# Altium PCB LPS.PcbDoc
Units mm, origin at the board's own origin, x right, y up, seen from the top; angles counter-clockwise.
Board outline 50 x 100 mm, 2 copper layers (Top Layer, Bottom Layer); 34 components, 18 nets, 81 pads, 2 vias.
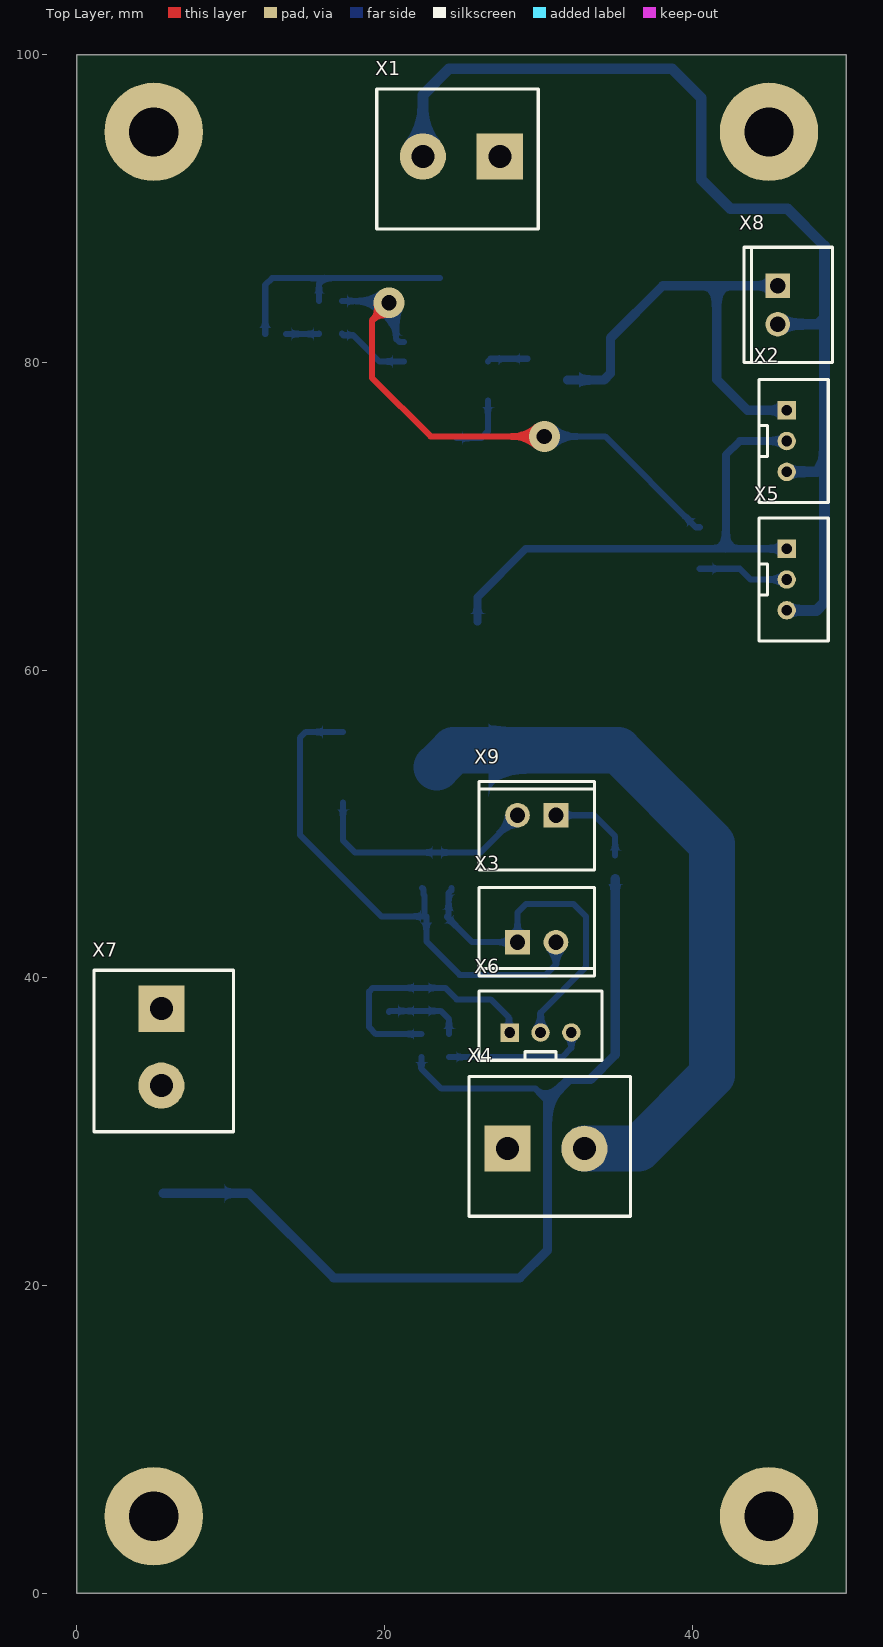
[diagram p0: Top Layer view]
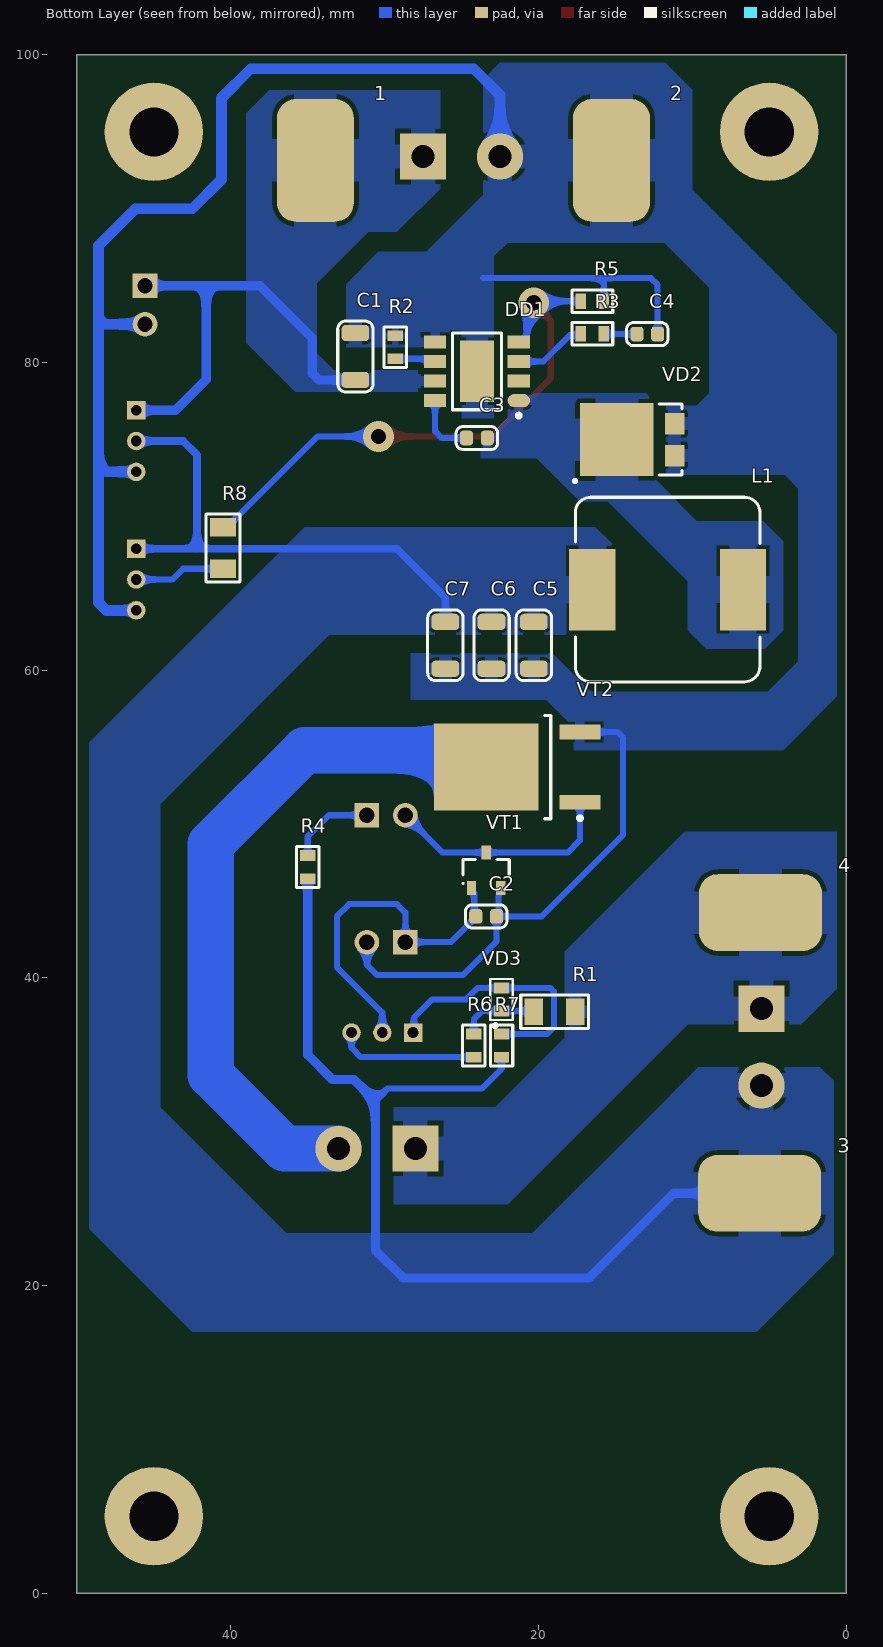
[diagram p1: Bottom Layer view, seen from below]
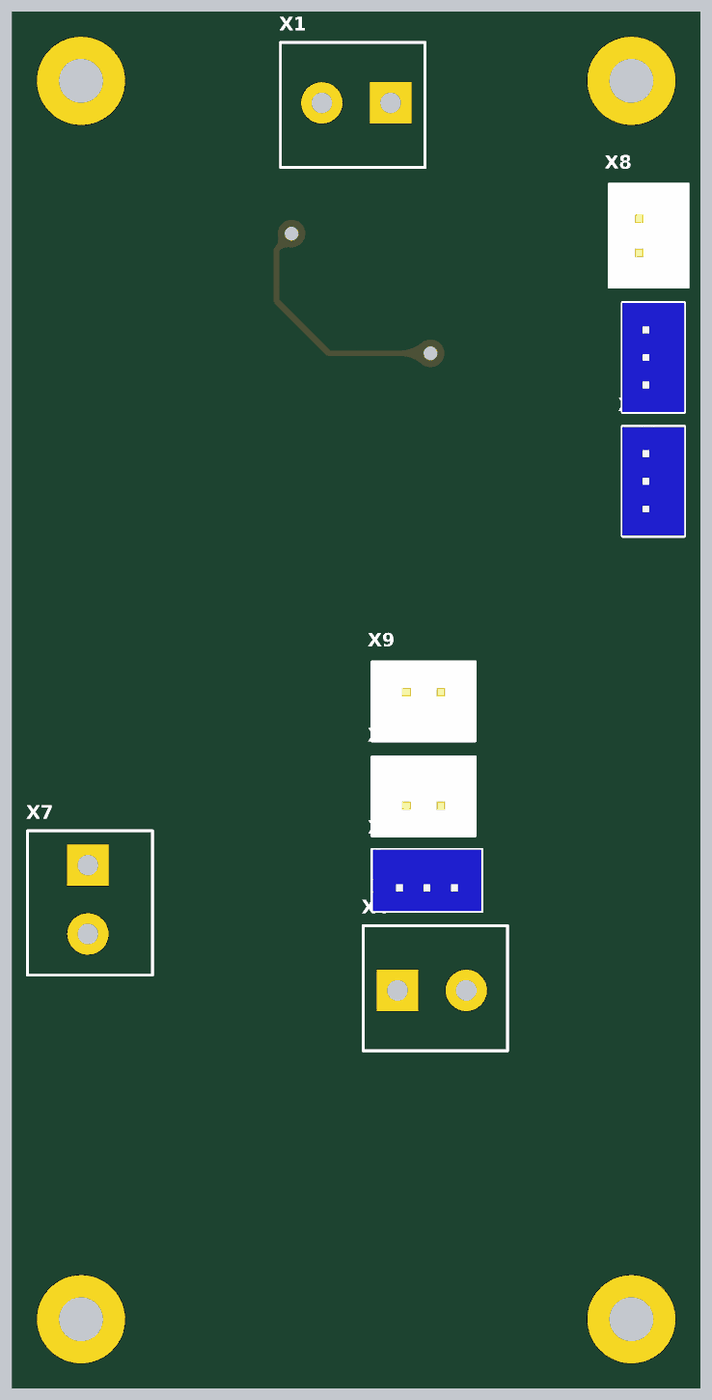
[diagram p2: 3D render of the assembled board from above, using the file's embedded part models]
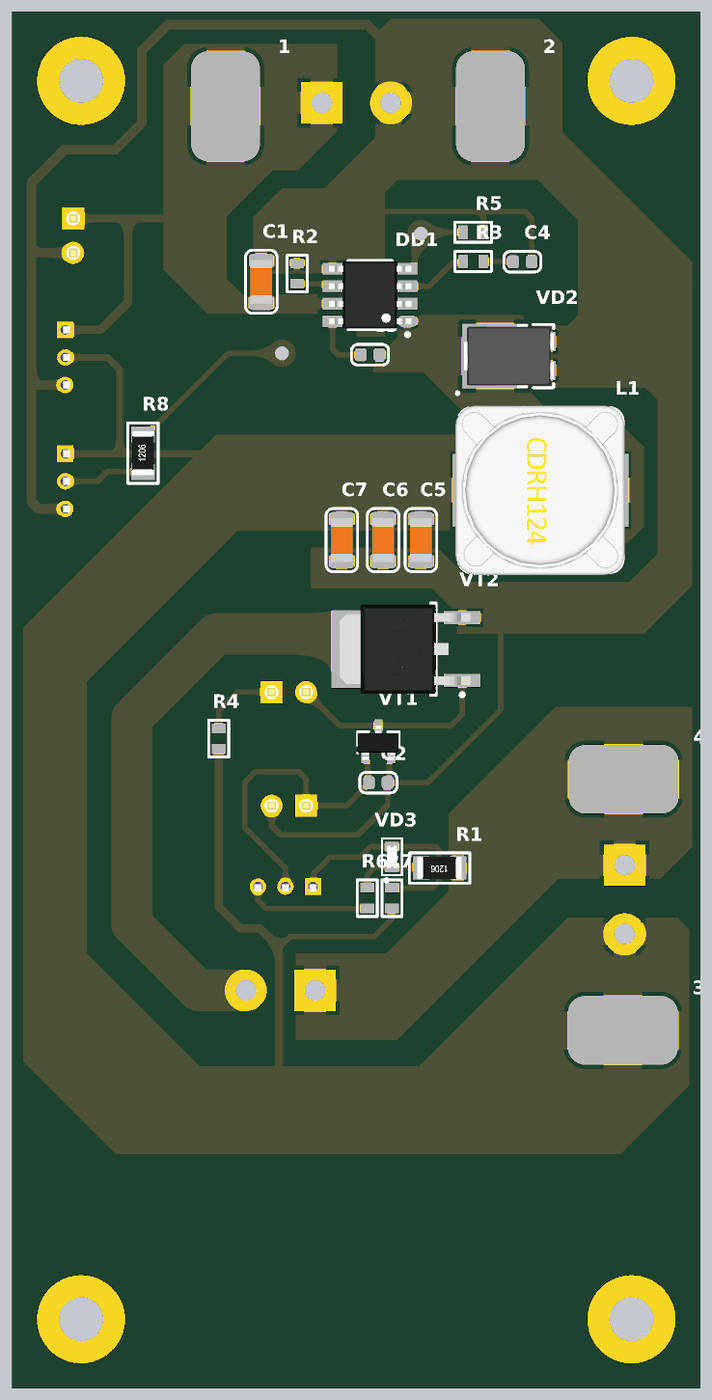
[diagram p3: 3D render of the assembled board from below, using the file's embedded part models]

## Layer stack, top to bottom
Top Solder: solder mask 0.0102, Solder Resist, Dk 3.5
Top Layer: signal copper 0.0356
Dielectric 1: dielectric 0.32, FR-4, Dk 4.8
Bottom Layer: signal copper 0.0356
Bottom Solder: solder mask 0.0102, Solder Resist, Dk 3.5

## Board outline
0.006,0.006 50.006,0.006 50.006,100.006 0.006,100.006

## Design rules (kind name [scope] priority, off if disabled: settings)
AcuteAngle min_acute_angle [OnCopper] p1: minimum=3.50000000000000E+0001 checktracksonly=FALSE // Минимальный угол между примитивами топологии
BoardOutlineClearance board_outline_clearance_std [NOT (OnLayer('Bottom Overlay') OR OnLayer('Top Overlay'))] p1: gap=0.25 ignorepadtopadclearanceinfootprint=FALSE except(0: Arc-SplitContinuation Track-SplitContinuation SMDPad-SplitContinuation THPad-SplitContinuation Via-SplitContinuation Fill-SplitContinuation Poly-SplitContinuation Region-SplitContinuation Text-SplitContinuation) // Отступ элементов топологии от края фрезеруемой печатной платы
Clearance clearance_poly_to_diff [InPolygonClass('FILL') vs InAnyDifferentialPair] p1: gap=0.2 ignorepadtopadclearanceinfootprint=FALSE except(0.25: Arc-Hole Track-Hole SMDPad-Hole THPad-Hole Via-Hole Fill-Hole Poly-Hole Region-Hole Text-Hole; 0.5: Arc-Poly Track-Poly SMDPad-Poly THPad-Poly Via-Poly) // Зазор между полигоном и дифференциальной парой
Clearance clearance_outer_35um_std [OnTopLayer OR OnBottomLayer] p2: gap=0.4 ignorepadtopadclearanceinfootprint=FALSE // Зазоры на внешних слоях
Clearance clearance_inner_35um_std [NOT (OnTopLayer Or OnBottomLayer)] p3: gap=0.2 ignorepadtopadclearanceinfootprint=FALSE except(0.25: Arc-Hole Track-Hole SMDPad-Hole THPad-Hole Via-Hole Fill-Hole Poly-Hole Region-Hole Text-Hole) // Зазоры на внутренних слоях
ComponentClearance [All] p1: gap=0 collisioncheckmode=3 verticalgap=0 showdistances=FALSE
DiffPairsRouting diff_pairs_routing [All] p1: maxlimit=0.127 minlimit=0.127 mostfreqgap=0.127 toplayer_minwidth=0.143 toplayer_maxwidth=0.143 toplayer_prefwidth=0.143 bottomlayer_minwidth=0.143 bottomlayer_maxwidth=0.143 bottomlayer_prefwidth=0.143 impedanceprofiledriven=TRUE impedanceprofileid={FD46899E-B5A2-4EF5-A302-5D2DB6A51F35} maxuncoupledlength=12.7 // Правила трассировки дифференциальных пар
HoleSize min_hole_size_std [IsPad] p1: absolutevalues=TRUE maxlimit=5.9 minlimit=0.6 maxpercent=80.000 minpercent=20.000 // Диаметр межслойного переходного отверстия
HoleSize min_hole_size_via_std [IsVia] p2: absolutevalues=TRUE maxlimit=5.9 minlimit=0.3 maxpercent=80.000 minpercent=20.000 // Минимальный диаметр монтажного отверстия
HoleToHoleClearance hole_to_hole_clearance_std [All] p1: gap=0.2 allowstackedmicrovias=FALSE // Минимальное расстояние между краями двух отверстий
MinimumAnnularRing min_via_ar_std [All] p1: minimumring=0.15 // Поясок площадки переходного отверстия (Annular ring VIA)
MinimumAnnularRing min_pad_ar_std [All] p2: minimumring=0.2 // Поясок монтажной контактной площадки (Annular ring PAD)
MinimumSolderMaskSliver min_solder_mask_bridge_std [All] p1: minsoldermaskwidth=0.15 // Мнимальная ширина масочного мостика
PlaneClearance plane_clearance_antipads [InAnyDifferentialPair] p1: clearance=0.5 // Отступ полигона от дифференциальных пар
PlaneClearance plane_clearance_35um_std [All] p2: clearance=0.2 // Отступ полигона (для слоя plane) от элементов топологии
PlaneConnect "plane_connect_to pad<=0.3" [(AsMM(PadXSize_AllLayers)<=0.301) or (AsMM(PadYSize_AllLayers)<=0.301)] p1 off: pad.planeconnectstyle=Relief pad.reliefexpansion=0.2 pad.reliefentries=4 pad.reliefconductorwidth=0.2 pad.reliefairgap=0.2 via.planeconnectstyle=Direct via.reliefexpansion=0.5 via.reliefentries=4 via.reliefconductorwidth=0.2 via.reliefairgap=0.2 // Правила подключения полигонов для падов от 0,3мм и меньше
PlaneConnect "plane_connect_to pad<=0.4" [(AsMM(PadXSize_AllLayers)<=0.401) or (AsMM(PadYSize_AllLayers)<=0.401)] p2 off: pad.planeconnectstyle=Relief pad.reliefexpansion=0.2 pad.reliefentries=4 pad.reliefconductorwidth=0.2 pad.reliefairgap=0.3 via.planeconnectstyle=Direct via.reliefexpansion=0.5 via.reliefentries=4 via.reliefconductorwidth=0.2 via.reliefairgap=0.2 // Правила подключения полигонов для падов от 0,4мм и меньше
PlaneConnect "plane_connect_to pad<=0.6" [(AsMM(PadXSize_AllLayers)<=0.601) or (AsMM(PadYSize_AllLayers)<=0.601)] p3 off: pad.planeconnectstyle=Relief pad.reliefexpansion=0.2 pad.reliefentries=4 pad.reliefconductorwidth=0.3 pad.reliefairgap=0.3 via.planeconnectstyle=Direct via.reliefexpansion=0.5 via.reliefentries=4 via.reliefconductorwidth=0.2 via.reliefairgap=0.2 // Правила подключения полигонов для падов от 0,6мм и меньше
PlaneConnect "plane_connect_to pad<=0.7" [(AsMM(PadXSize_AllLayers)<=0.701) or (AsMM(PadYSize_AllLayers)<=0.701)] p4 off: pad.planeconnectstyle=Relief pad.reliefexpansion=0.6 pad.reliefentries=4 pad.reliefconductorwidth=0.35 pad.reliefairgap=0.3 via.planeconnectstyle=Direct via.reliefexpansion=0.5 via.reliefentries=4 via.reliefconductorwidth=0.2 via.reliefairgap=0.2 // Правила подключения полигонов для падов от 0,7мм и меньше
PlaneConnect "plane_connect_to pad<=0.8" [(AsMM(PadXSize_AllLayers)<=0.801) or (AsMM(PadYSize_AllLayers)<=0.801)] p5 off: pad.planeconnectstyle=Relief pad.reliefexpansion=0.7 pad.reliefentries=4 pad.reliefconductorwidth=0.4 pad.reliefairgap=0.3 via.planeconnectstyle=Direct via.reliefexpansion=0.5 via.reliefentries=4 via.reliefconductorwidth=0.2 via.reliefairgap=0.2 // Правила подключения полигонов для падов от 0,8мм и меньше
PlaneConnect "plane_connect_to pad<=1" [(AsMM(PadXSize_AllLayers)<=1.01) or (AsMM(PadYSize_AllLayers)<=1.01)] p6 off: pad.planeconnectstyle=Relief pad.reliefexpansion=0.8 pad.reliefentries=4 pad.reliefconductorwidth=0.5 pad.reliefairgap=0.3 via.planeconnectstyle=Direct via.reliefexpansion=0.5 via.reliefentries=4 via.reliefconductorwidth=0.2 via.reliefairgap=0.2 // Правила подключения полигонов для падов от 1мм и меньше
PlaneConnect "plane_connect_to pad<=1.3" [(AsMM(PadXSize_AllLayers)<=1.31) or (AsMM(PadYSize_AllLayers)<=1.31)] p7 off: pad.planeconnectstyle=Relief pad.reliefexpansion=1.1 pad.reliefentries=4 pad.reliefconductorwidth=0.65 pad.reliefairgap=0.3 via.planeconnectstyle=Direct via.reliefexpansion=0.5 via.reliefentries=4 via.reliefconductorwidth=0.2 via.reliefairgap=0.2 // Правила подключения полигонов для падов от 1,3мм и меньше
PlaneConnect "plane_connect_to pad<=1.6" [(AsMM(PadXSize_AllLayers)<=1.61) or (AsMM(PadYSize_AllLayers)<=1.61)] p8 off: pad.planeconnectstyle=Relief pad.reliefexpansion=1.4 pad.reliefentries=4 pad.reliefconductorwidth=0.8 pad.reliefairgap=0.3 via.planeconnectstyle=Direct via.reliefexpansion=0.5 via.reliefentries=4 via.reliefconductorwidth=0.2 via.reliefairgap=0.2 // Правила подключения полигонов для падов от 1,6мм и меньше
PlaneConnect "plane_connect_to pad<=1.8" [(AsMM(PadXSize_AllLayers)<=1.81) or (AsMM(PadYSize_AllLayers)<=1.81)] p9 off: pad.planeconnectstyle=Relief pad.reliefexpansion=1.6 pad.reliefentries=4 pad.reliefconductorwidth=0.9 pad.reliefairgap=0.3 via.planeconnectstyle=Direct via.reliefexpansion=0.5 via.reliefentries=4 via.reliefconductorwidth=0.2 via.reliefairgap=0.2 // Правила подключения полигонов для падов от 1,8мм и меньше
PlaneConnect "plane_connect_to pad<=2" [(AsMM(PadXSize_AllLayers)<=2.01) or (AsMM(PadYSize_AllLayers)<=2.01)] p10 off: pad.planeconnectstyle=Relief pad.reliefexpansion=1.8 pad.reliefentries=4 pad.reliefconductorwidth=1 pad.reliefairgap=0.3 via.planeconnectstyle=Direct via.reliefexpansion=0.5 via.reliefentries=4 via.reliefconductorwidth=0.2 via.reliefairgap=0.2 // Правила подключения полигонов для падов от 2мм и меньше
PlaneConnect "plane_connect_to pad<=2.3" [(AsMM(PadXSize_AllLayers)<=2.31) or (AsMM(PadYSize_AllLayers)<=2.31)] p11 off: pad.planeconnectstyle=Relief pad.reliefexpansion=2.1 pad.reliefentries=4 pad.reliefconductorwidth=1.15 pad.reliefairgap=0.3 via.planeconnectstyle=Direct via.reliefexpansion=0.5 via.reliefentries=4 via.reliefconductorwidth=0.2 via.reliefairgap=0.2 // Правила подключения полигонов для падов от 2,3мм и меньше
PlaneConnect "plane_connect_to pad<=2.5" [(AsMM(PadXSize_AllLayers)<=2.51) or (AsMM(PadYSize_AllLayers)<=2.51)] p12 off: pad.planeconnectstyle=Relief pad.reliefexpansion=2.3 pad.reliefentries=4 pad.reliefconductorwidth=1.25 pad.reliefairgap=0.3 via.planeconnectstyle=Direct via.reliefexpansion=0.5 via.reliefentries=4 via.reliefconductorwidth=0.2 via.reliefairgap=0.2 // Правила подключения полигонов для падов от 2,5мм и меньше
PlaneConnect "plane_connect_to pad<=2.7" [(AsMM(PadXSize_AllLayers)<=2.71) or (AsMM(PadYSize_AllLayers)<=2.71)] p13 off: pad.planeconnectstyle=Relief pad.reliefexpansion=2.5 pad.reliefentries=4 pad.reliefconductorwidth=1.35 pad.reliefairgap=0.3 via.planeconnectstyle=Direct via.reliefexpansion=0.5 via.reliefentries=4 via.reliefconductorwidth=0.2 via.reliefairgap=0.2 // Правила подключения полигонов для падов от 2,7мм и меньше
PlaneConnect "plane_connect_to pad<=3" [(AsMM(PadXSize_AllLayers)<=3.01) or (AsMM(PadYSize_AllLayers)<=3.01)] p14 off: pad.planeconnectstyle=Relief pad.reliefexpansion=2.8 pad.reliefentries=4 pad.reliefconductorwidth=1.5 pad.reliefairgap=0.3 via.planeconnectstyle=Direct via.reliefexpansion=0.5 via.reliefentries=4 via.reliefconductorwidth=0.2 via.reliefairgap=0.2 // Правила подключения полигонов для падов от 3мм и меньше
PlaneConnect "plane_connect_to pad<=3.5" [(AsMM(PadXSize_AllLayers)<=3.51) or (AsMM(PadYSize_AllLayers)<=3.51)] p15 off: pad.planeconnectstyle=Relief pad.reliefexpansion=3.3 pad.reliefentries=4 pad.reliefconductorwidth=1.75 pad.reliefairgap=0.4 via.planeconnectstyle=Direct via.reliefexpansion=0.5 via.reliefentries=4 via.reliefconductorwidth=0.2 via.reliefairgap=0.2 // Правила подключения полигонов для падов от 3.5мм и меньше
PlaneConnect "plane_connect_to pad<=4" [(AsMM(PadXSize_AllLayers)<=4.01) or (AsMM(PadYSize_AllLayers)<=4.01)] p16 off: pad.planeconnectstyle=Relief pad.reliefexpansion=3.8 pad.reliefentries=4 pad.reliefconductorwidth=2 pad.reliefairgap=0.4 via.planeconnectstyle=Direct via.reliefexpansion=0.5 via.reliefentries=4 via.reliefconductorwidth=0.2 via.reliefairgap=0.2 // Правила подключения полигонов для падов от 4мм и меньше
PlaneConnect "plane_connect_to pad<=4.5" [(AsMM(PadXSize_AllLayers)<=4.51) or (AsMM(PadYSize_AllLayers)<=4.51)] p17 off: pad.planeconnectstyle=Relief pad.reliefexpansion=4.3 pad.reliefentries=4 pad.reliefconductorwidth=2.25 pad.reliefairgap=0.4 via.planeconnectstyle=Direct via.reliefexpansion=0.5 via.reliefentries=4 via.reliefconductorwidth=0.2 via.reliefairgap=0.2 // Правила подключения полигонов для падов от 4.5мм и меньше
PlaneConnect "plane_connect_to pad<=5" [(AsMM(PadXSize_AllLayers)<=5.01) or (AsMM(PadYSize_AllLayers)<=5.01)] p18 off: pad.planeconnectstyle=Relief pad.reliefexpansion=4.8 pad.reliefentries=4 pad.reliefconductorwidth=2.5 pad.reliefairgap=0.4 via.planeconnectstyle=Direct via.reliefexpansion=0.5 via.reliefentries=4 via.reliefconductorwidth=0.2 via.reliefairgap=0.2 // Правила подключения полигонов для падов от 5мм и меньше
PlaneConnect "plane_connect_to pad<=5.5" [(AsMM(PadXSize_AllLayers)<=5.51) or (AsMM(PadYSize_AllLayers)<=5.51)] p19 off: pad.planeconnectstyle=Relief pad.reliefexpansion=5.3 pad.reliefentries=4 pad.reliefconductorwidth=2.75 pad.reliefairgap=0.4 via.planeconnectstyle=Direct via.reliefexpansion=0.5 via.reliefentries=4 via.reliefconductorwidth=0.2 via.reliefairgap=0.2 // Правила подключения полигонов для падов от 5,5мм и меньше
PlaneConnect "plane_connect_to pad<=6" [(AsMM(PadXSize_AllLayers)<=6.01) or (AsMM(PadYSize_AllLayers)<=6.01)] p20 off: pad.planeconnectstyle=Relief pad.reliefexpansion=5.8 pad.reliefentries=4 pad.reliefconductorwidth=3 pad.reliefairgap=0.5 via.planeconnectstyle=Direct via.reliefexpansion=0.5 via.reliefentries=4 via.reliefconductorwidth=0.2 via.reliefairgap=0.2 // Правила подключения полигонов для падов от 6мм и меньше
PlaneConnect "plane_connect_to pad<=6.5" [(AsMM(PadXSize_AllLayers)<=6.51) or (AsMM(PadYSize_AllLayers)<=6.51)] p21 off: pad.planeconnectstyle=Relief pad.reliefexpansion=6.3 pad.reliefentries=4 pad.reliefconductorwidth=3.25 pad.reliefairgap=0.5 via.planeconnectstyle=Direct via.reliefexpansion=0.5 via.reliefentries=4 via.reliefconductorwidth=0.2 via.reliefairgap=0.2 // Правила подключения полигонов для падов от 6,5мм и меньше
PlaneConnect "plane_connect_to pad<=7" [(AsMM(PadXSize_AllLayers)<=7.01) or (AsMM(PadYSize_AllLayers)<=7.01)] p22 off: pad.planeconnectstyle=Relief pad.reliefexpansion=6.8 pad.reliefentries=4 pad.reliefconductorwidth=3.5 pad.reliefairgap=0.5 via.planeconnectstyle=Direct via.reliefexpansion=0.5 via.reliefentries=4 via.reliefconductorwidth=0.2 via.reliefairgap=0.2 // Правила подключения полигонов для падов от 7мм и меньше
PlaneConnect "plane_connect_to pad<=7.5" [(AsMM(PadXSize_AllLayers)<=7.51) or (AsMM(PadYSize_AllLayers)<=7.51)] p23 off: pad.planeconnectstyle=Relief pad.reliefexpansion=7.3 pad.reliefentries=4 pad.reliefconductorwidth=3.75 pad.reliefairgap=0.5 via.planeconnectstyle=Direct via.reliefexpansion=0.5 via.reliefentries=4 via.reliefconductorwidth=0.2 via.reliefairgap=0.2 // Правила подключения полигонов для падов от 7,5мм и меньше
PlaneConnect "plane_connect_to pad<=8" [(AsMM(PadXSize_AllLayers)<=8.01) or (AsMM(PadYSize_AllLayers)<=8.01)] p24 off: pad.planeconnectstyle=Relief pad.reliefexpansion=7.8 pad.reliefentries=4 pad.reliefconductorwidth=4 pad.reliefairgap=0.5 via.planeconnectstyle=Direct via.reliefexpansion=0.5 via.reliefentries=4 via.reliefconductorwidth=0.2 via.reliefairgap=0.2 // Правила подключения полигонов для падов от 8мм и меньше
PlaneConnect "plane_connect_to pad<=8.5" [(AsMM(PadXSize_AllLayers)<=8.51) or (AsMM(PadYSize_AllLayers)<=8.51)] p25 off: pad.planeconnectstyle=Relief pad.reliefexpansion=8.3 pad.reliefentries=4 pad.reliefconductorwidth=4.25 pad.reliefairgap=0.5 via.planeconnectstyle=Direct via.reliefexpansion=0.5 via.reliefentries=4 via.reliefconductorwidth=0.2 via.reliefairgap=0.2 // Правила подключения полигонов для падов от 8,5мм и меньше
PlaneConnect "plane_connect_to pad<=9" [(AsMM(PadXSize_AllLayers)<=9.01) or (AsMM(PadYSize_AllLayers)<=9.01)] p26 off: pad.planeconnectstyle=Relief pad.reliefexpansion=8.8 pad.reliefentries=4 pad.reliefconductorwidth=4.5 pad.reliefairgap=0.5 via.planeconnectstyle=Direct via.reliefexpansion=0.5 via.reliefentries=4 via.reliefconductorwidth=0.2 via.reliefairgap=0.2 // Правила подключения полигонов для падов от 9мм и меньше
PlaneConnect "plane_connect_to pad<=9.5" [(AsMM(PadXSize_AllLayers)<=9.51) or (AsMM(PadYSize_AllLayers)<=9.51)] p27 off: pad.planeconnectstyle=Relief pad.reliefexpansion=9.3 pad.reliefentries=4 pad.reliefconductorwidth=4.75 pad.reliefairgap=0.5 via.planeconnectstyle=Direct via.reliefexpansion=0.5 via.reliefentries=4 via.reliefconductorwidth=0.2 via.reliefairgap=0.2 // Правила подключения полигонов для падов от 9,5мм и меньше
PlaneConnect "plane_connect_to pad<=10" [(AsMM(PadXSize_AllLayers)<=10.01) or (AsMM(PadYSize_AllLayers)<=10.01)] p28 off: pad.planeconnectstyle=Relief pad.reliefexpansion=9.8 pad.reliefentries=4 pad.reliefconductorwidth=5 pad.reliefairgap=0.5 via.planeconnectstyle=Direct via.reliefexpansion=0.5 via.reliefentries=4 via.reliefconductorwidth=0.2 via.reliefairgap=0.2 // Правила подключения полигонов для падов от 10мм и меньше
PlaneConnect plane_connect_to_pad [All] p29 off: pad.planeconnectstyle=Relief pad.reliefexpansion=0.5 pad.reliefentries=4 pad.reliefconductorwidth=0.2 pad.reliefairgap=0.2 via.planeconnectstyle=Direct via.reliefexpansion=0.5 via.reliefentries=4 via.reliefconductorwidth=0.2 via.reliefairgap=0.2 // Правила подключения полигонов общие
PlaneConnect [All] p30 off: planeconnectstyle=Relief reliefexpansion=0.5 reliefentries=4 reliefconductorwidth=0.2 reliefairgap=0.2
PolygonConnect poly_connect_direct [InPolygonClass('DIRECT')] p1: connectstyle=Direct reliefconductorwidth=0.254 reliefentries=4 polygonreliefangle="90 Angle" airgapwidth=0.254 // Подключение без термобарьеров к полигонам, относящимся к классу DIRECT
PolygonConnect poly_connect_to_pad<=0.3 [(AsMM(PadXSize_AllLayers)<=0.301) or (AsMM(PadYSize_AllLayers)<=0.301)] p2: thpad.connectstyle=Relief thpad.reliefconductorwidth=0.2 thpad.reliefentries=4 thpad.polygonreliefangle="90 Angle" thpad.airgapwidth=0.2 smdpad.connectstyle=Relief smdpad.reliefconductorwidth=0.2 smdpad.reliefentries=4 smdpad.polygonreliefangle="90 Angle" smdpad.airgapwidth=0.2 via.connectstyle=Direct via.reliefconductorwidth=0.254 via.reliefentries=4 via.polygonreliefangle="90 Angle" via.airgapwidth=0.254 // Правила подключения полигонов для падов от 0,3мм и меньше
PolygonConnect poly_connect_to_pad<=0.4 [(AsMM(PadXSize_AllLayers)<=0.401) or (AsMM(PadYSize_AllLayers)<=0.401)] p3: thpad.connectstyle=Relief thpad.reliefconductorwidth=0.26 thpad.reliefentries=4 thpad.polygonreliefangle="90 Angle" thpad.airgapwidth=0.2 smdpad.connectstyle=Relief smdpad.reliefconductorwidth=0.26 smdpad.reliefentries=4 smdpad.polygonreliefangle="90 Angle" smdpad.airgapwidth=0.2 via.connectstyle=Direct via.reliefconductorwidth=0.254 via.reliefentries=4 via.polygonreliefangle="90 Angle" via.airgapwidth=0.254 // Правила подключения полигонов для падов от 0,4 и меньше
PolygonConnect poly_connect_to_pad<=0.6 [(AsMM(PadXSize_AllLayers)<=0.601) or (AsMM(PadYSize_AllLayers)<=0.601)] p4: thpad.connectstyle=Relief thpad.reliefconductorwidth=0.33 thpad.reliefentries=4 thpad.polygonreliefangle="90 Angle" thpad.airgapwidth=0.2 smdpad.connectstyle=Relief smdpad.reliefconductorwidth=0.33 smdpad.reliefentries=4 smdpad.polygonreliefangle="90 Angle" smdpad.airgapwidth=0.2 via.connectstyle=Direct via.reliefconductorwidth=0.254 via.reliefentries=4 via.polygonreliefangle="90 Angle" via.airgapwidth=0.254 // Правила подключения полигонов для падов от 0,6мм и меньше
PolygonConnect poly_connect_to_pad<=0.7 [(AsMM(PadXSize_AllLayers)<=0.701) or (AsMM(PadYSize_AllLayers)<=0.701)] p5: thpad.connectstyle=Relief thpad.reliefconductorwidth=0.46 thpad.reliefentries=4 thpad.polygonreliefangle="90 Angle" thpad.airgapwidth=0.2 smdpad.connectstyle=Relief smdpad.reliefconductorwidth=0.46 smdpad.reliefentries=4 smdpad.polygonreliefangle="90 Angle" smdpad.airgapwidth=0.2 via.connectstyle=Direct via.reliefconductorwidth=0.254 via.reliefentries=4 via.polygonreliefangle="90 Angle" via.airgapwidth=0.254 // Правила подключения полигонов для падов от 0,7мм и меньше
PolygonConnect poly_connect_to_pad<=0.8 [(AsMM(PadXSize_AllLayers)<=0.8)or(AsMM(PadYSize_AllLayers)<=0.8)] p6: thpad.connectstyle=Relief thpad.reliefconductorwidth=0.53 thpad.reliefentries=4 thpad.polygonreliefangle="90 Angle" thpad.airgapwidth=0.3 smdpad.connectstyle=Relief smdpad.reliefconductorwidth=0.53 smdpad.reliefentries=4 smdpad.polygonreliefangle="90 Angle" smdpad.airgapwidth=0.2 via.connectstyle=Direct via.reliefconductorwidth=0.254 via.reliefentries=4 via.polygonreliefangle="90 Angle" via.airgapwidth=0.254 // Правила подключения полигонов для падов от 0,8мм и меньше
PolygonConnect poly_connect_to_pad<=1 [(AsMM(PadXSize_AllLayers)<=1.01)or(AsMM(PadYSize_AllLayers)<=1.01)] p7: thpad.connectstyle=Relief thpad.reliefconductorwidth=0.6 thpad.reliefentries=4 thpad.polygonreliefangle="90 Angle" thpad.airgapwidth=0.3 smdpad.connectstyle=Relief smdpad.reliefconductorwidth=0.6 smdpad.reliefentries=4 smdpad.polygonreliefangle="90 Angle" smdpad.airgapwidth=0.2 via.connectstyle=Direct via.reliefconductorwidth=0.254 via.reliefentries=4 via.polygonreliefangle="90 Angle" via.airgapwidth=0.254 // Правила подключения полигонов для падов от 1мм и меньше
PolygonConnect poly_connect_to_pad<=1.3 [(AsMM(PadXSize_AllLayers)<=1.31)or(AsMM(PadYSize_AllLayers)<=1.31)] p8: thpad.connectstyle=Relief thpad.reliefconductorwidth=0.66 thpad.reliefentries=4 thpad.polygonreliefangle="90 Angle" thpad.airgapwidth=0.3 smdpad.connectstyle=Relief smdpad.reliefconductorwidth=0.86 smdpad.reliefentries=4 smdpad.polygonreliefangle="90 Angle" smdpad.airgapwidth=0.2 via.connectstyle=Direct via.reliefconductorwidth=0.254 via.reliefentries=4 via.polygonreliefangle="90 Angle" via.airgapwidth=0.254 // Правила подключения полигонов для падов от 1,3мм и меньше
PolygonConnect poly_connect_to_pad<=1.6 [(AsMM(PadXSize_AllLayers)<=1.61)or(AsMM(PadYSize_AllLayers)<=1.61)] p9: thpad.connectstyle=Relief thpad.reliefconductorwidth=0.8 thpad.reliefentries=4 thpad.polygonreliefangle="90 Angle" thpad.airgapwidth=0.3 smdpad.connectstyle=Relief smdpad.reliefconductorwidth=1 smdpad.reliefentries=4 smdpad.polygonreliefangle="90 Angle" smdpad.airgapwidth=0.2 via.connectstyle=Direct via.reliefconductorwidth=0.254 via.reliefentries=4 via.polygonreliefangle="90 Angle" via.airgapwidth=0.254 // Правила подключения полигонов для падов от 1,6мм и меньше
PolygonConnect poly_connect_to_pad<=1.8 [(AsMM(PadXSize_AllLayers)<=1.8)or(AsMM(PadYSize_AllLayers)<=1.8)] p10: thpad.connectstyle=Relief thpad.reliefconductorwidth=1 thpad.reliefentries=4 thpad.polygonreliefangle="90 Angle" thpad.airgapwidth=0.3 smdpad.connectstyle=Relief smdpad.reliefconductorwidth=1.2 smdpad.reliefentries=4 smdpad.polygonreliefangle="90 Angle" smdpad.airgapwidth=0.2 via.connectstyle=Direct via.reliefconductorwidth=0.254 via.reliefentries=4 via.polygonreliefangle="90 Angle" via.airgapwidth=0.254 // Правила подключения полигонов для падов от 1,8мм и меньше
PolygonConnect poly_connect_to_pad<=2 [(AsMM(PadXSize_AllLayers)<=2.01)or(AsMM(PadYSize_AllLayers)<=2.01)] p11: thpad.connectstyle=Relief thpad.reliefconductorwidth=1.1 thpad.reliefentries=4 thpad.polygonreliefangle="90 Angle" thpad.airgapwidth=0.3 smdpad.connectstyle=Relief smdpad.reliefconductorwidth=1.4 smdpad.reliefentries=4 smdpad.polygonreliefangle="90 Angle" smdpad.airgapwidth=0.2 via.connectstyle=Direct via.reliefconductorwidth=0.254 via.reliefentries=4 via.polygonreliefangle="90 Angle" via.airgapwidth=0.254 // Правила подключения полигонов для падов от 2мм и меньше
PolygonConnect poly_connect_to_pad<=2.3 [(AsMM(PadXSize_AllLayers)<=2.31)or(AsMM(PadYSize_AllLayers)<=2.31)] p12: thpad.connectstyle=Relief thpad.reliefconductorwidth=1.2 thpad.reliefentries=4 thpad.polygonreliefangle="90 Angle" thpad.airgapwidth=0.3 smdpad.connectstyle=Relief smdpad.reliefconductorwidth=1.4 smdpad.reliefentries=4 smdpad.polygonreliefangle="90 Angle" smdpad.airgapwidth=0.2 via.connectstyle=Direct via.reliefconductorwidth=0.254 via.reliefentries=4 via.polygonreliefangle="90 Angle" via.airgapwidth=0.254 // Правила подключения полигонов для падов от 2,3мм и меньше
PolygonConnect poly_connect_to_pad<=2.5 [(AsMM(PadXSize_AllLayers)<=2.51)or(AsMM(PadYSize_AllLayers)<=2.51)] p13: thpad.connectstyle=Relief thpad.reliefconductorwidth=1.2 thpad.reliefentries=4 thpad.polygonreliefangle="90 Angle" thpad.airgapwidth=0.3 smdpad.connectstyle=Relief smdpad.reliefconductorwidth=1.4 smdpad.reliefentries=4 smdpad.polygonreliefangle="90 Angle" smdpad.airgapwidth=0.2 via.connectstyle=Direct via.reliefconductorwidth=0.254 via.reliefentries=4 via.polygonreliefangle="90 Angle" via.airgapwidth=0.254 // Правила подключения полигонов для падов от 2,5мм и меньше
PolygonConnect poly_connect_to_pad<=2.7 [(AsMM(PadXSize_AllLayers)<=2.71)or(AsMM(PadYSize_AllLayers)<=2.71)] p14: thpad.connectstyle=Relief thpad.reliefconductorwidth=1.4 thpad.reliefentries=4 thpad.polygonreliefangle="90 Angle" thpad.airgapwidth=0.3 smdpad.connectstyle=Relief smdpad.reliefconductorwidth=1.6 smdpad.reliefentries=4 smdpad.polygonreliefangle="90 Angle" smdpad.airgapwidth=0.2 via.connectstyle=Direct via.reliefconductorwidth=0.254 via.reliefentries=4 via.polygonreliefangle="90 Angle" via.airgapwidth=0.254 // Правила подключения полигонов для падов от 2,7мм и меньше
PolygonConnect poly_connect_to_pad<=3 [(AsMM(PadXSize_AllLayers)<=3.01)or(AsMM(PadYSize_AllLayers)<=3.01)] p15: thpad.connectstyle=Relief thpad.reliefconductorwidth=1.6 thpad.reliefentries=4 thpad.polygonreliefangle="90 Angle" thpad.airgapwidth=0.3 smdpad.connectstyle=Relief smdpad.reliefconductorwidth=1.8 smdpad.reliefentries=4 smdpad.polygonreliefangle="90 Angle" smdpad.airgapwidth=0.2 via.connectstyle=Direct via.reliefconductorwidth=0.254 via.reliefentries=4 via.polygonreliefangle="90 Angle" via.airgapwidth=0.254 // Правила подключения полигонов для падов от 3мм и меньше
PolygonConnect poly_connect_to_pad<=3.5 [(AsMM(PadXSize_AllLayers)<=3.51)or(AsMM(PadYSize_AllLayers)<=3.51)] p16: thpad.connectstyle=Relief thpad.reliefconductorwidth=1.8 thpad.reliefentries=4 thpad.polygonreliefangle="90 Angle" thpad.airgapwidth=0.4 smdpad.connectstyle=Relief smdpad.reliefconductorwidth=2 smdpad.reliefentries=4 smdpad.polygonreliefangle="90 Angle" smdpad.airgapwidth=0.3 via.connectstyle=Direct via.reliefconductorwidth=0.254 via.reliefentries=4 via.polygonreliefangle="90 Angle" via.airgapwidth=0.254 // Правила подключения полигонов для падов от 3,5мм и меньше
PolygonConnect poly_connect_to_pad<=4 [(AsMM(PadXSize_AllLayers)<=4.01)or(AsMM(PadYSize_AllLayers)<=4.01)] p17: thpad.connectstyle=Relief thpad.reliefconductorwidth=2.1 thpad.reliefentries=4 thpad.polygonreliefangle="90 Angle" thpad.airgapwidth=0.4 smdpad.connectstyle=Relief smdpad.reliefconductorwidth=2.3 smdpad.reliefentries=4 smdpad.polygonreliefangle="90 Angle" smdpad.airgapwidth=0.3 via.connectstyle=Direct via.reliefconductorwidth=0.254 via.reliefentries=4 via.polygonreliefangle="90 Angle" via.airgapwidth=0.254 // Правила подключения полигонов для падов от 4мм и меньше
PolygonConnect poly_connect_to_pad<=4.5 [(AsMM(PadXSize_AllLayers)<=4.51)or(AsMM(PadYSize_AllLayers)<=4.51)] p18: thpad.connectstyle=Relief thpad.reliefconductorwidth=2.35 thpad.reliefentries=4 thpad.polygonreliefangle="90 Angle" thpad.airgapwidth=0.4 smdpad.connectstyle=Relief smdpad.reliefconductorwidth=2.55 smdpad.reliefentries=4 smdpad.polygonreliefangle="90 Angle" smdpad.airgapwidth=0.3 via.connectstyle=Direct via.reliefconductorwidth=0.254 via.reliefentries=4 via.polygonreliefangle="90 Angle" via.airgapwidth=0.254 // Правила подключения полигонов для падов от 4.5мм и меньше
PolygonConnect poly_connect_to_pad<=5 [(AsMM(PadXSize_AllLayers)<=5.01)or(AsMM(PadYSize_AllLayers)<=5.01)] p19: thpad.connectstyle=Relief thpad.reliefconductorwidth=2.6 thpad.reliefentries=4 thpad.polygonreliefangle="90 Angle" thpad.airgapwidth=0.4 smdpad.connectstyle=Relief smdpad.reliefconductorwidth=2.8 smdpad.reliefentries=4 smdpad.polygonreliefangle="90 Angle" smdpad.airgapwidth=0.3 via.connectstyle=Direct via.reliefconductorwidth=0.254 via.reliefentries=4 via.polygonreliefangle="90 Angle" via.airgapwidth=0.254 // Правила подключения полигонов для падов от 5мм и меньше
PolygonConnect poly_connect_to_pad<=5.5 [(AsMM(PadXSize_AllLayers)<=5.51)or(AsMM(PadYSize_AllLayers)<=5.51)] p20: thpad.connectstyle=Relief thpad.reliefconductorwidth=2.85 thpad.reliefentries=4 thpad.polygonreliefangle="90 Angle" thpad.airgapwidth=0.4 smdpad.connectstyle=Relief smdpad.reliefconductorwidth=3.05 smdpad.reliefentries=4 smdpad.polygonreliefangle="90 Angle" smdpad.airgapwidth=0.3 via.connectstyle=Direct via.reliefconductorwidth=0.254 via.reliefentries=4 via.polygonreliefangle="90 Angle" via.airgapwidth=0.254 // Правила подключения полигонов для падов от 5.5мм и меньше
PolygonConnect poly_connect_to_pad<=6 [(AsMM(PadXSize_AllLayers)<=6.01)or(AsMM(PadYSize_AllLayers)<=6.01)] p21: thpad.connectstyle=Relief thpad.reliefconductorwidth=3.1 thpad.reliefentries=4 thpad.polygonreliefangle="90 Angle" thpad.airgapwidth=0.5 smdpad.connectstyle=Relief smdpad.reliefconductorwidth=3.3 smdpad.reliefentries=4 smdpad.polygonreliefangle="90 Angle" smdpad.airgapwidth=0.4 via.connectstyle=Direct via.reliefconductorwidth=0.254 via.reliefentries=4 via.polygonreliefangle="90 Angle" via.airgapwidth=0.254 // Правила подключения полигонов для падов от 6мм и меньше
PolygonConnect poly_connect_to_pad<=6.5 [(AsMM(PadXSize_AllLayers)<=6.51)or(AsMM(PadYSize_AllLayers)<=6.51)] p22: thpad.connectstyle=Relief thpad.reliefconductorwidth=3.4 thpad.reliefentries=4 thpad.polygonreliefangle="90 Angle" thpad.airgapwidth=0.5 smdpad.connectstyle=Relief smdpad.reliefconductorwidth=3.6 smdpad.reliefentries=4 smdpad.polygonreliefangle="90 Angle" smdpad.airgapwidth=0.4 via.connectstyle=Direct via.reliefconductorwidth=0.254 via.reliefentries=4 via.polygonreliefangle="90 Angle" via.airgapwidth=0.254 // Правила подключения полигонов для падов от 6,5мм и меньше
PolygonConnect poly_connect_to_pad<=7 [(AsMM(PadXSize_AllLayers)<7.01)or(AsMM(PadYSize_AllLayers)<=7.01)] p23: thpad.connectstyle=Relief thpad.reliefconductorwidth=3.6 thpad.reliefentries=4 thpad.polygonreliefangle="90 Angle" thpad.airgapwidth=0.5 smdpad.connectstyle=Relief smdpad.reliefconductorwidth=3.8 smdpad.reliefentries=4 smdpad.polygonreliefangle="90 Angle" smdpad.airgapwidth=0.4 via.connectstyle=Direct via.reliefconductorwidth=0.254 via.reliefentries=4 via.polygonreliefangle="90 Angle" via.airgapwidth=0.254 // Правила подключения полигонов для падов от 7мм и меньше
PolygonConnect poly_connect_to_pad<=7.5 [(AsMM(PadXSize_AllLayers)<7.51)or(AsMM(PadYSize_AllLayers)<=7.51)] p24: thpad.connectstyle=Relief thpad.reliefconductorwidth=3.9 thpad.reliefentries=4 thpad.polygonreliefangle="90 Angle" thpad.airgapwidth=0.5 smdpad.connectstyle=Relief smdpad.reliefconductorwidth=4.1 smdpad.reliefentries=4 smdpad.polygonreliefangle="90 Angle" smdpad.airgapwidth=0.4 via.connectstyle=Direct via.reliefconductorwidth=0.254 via.reliefentries=4 via.polygonreliefangle="90 Angle" via.airgapwidth=0.254 // Правила подключения полигонов для падов от 7,5мм и меньше
PolygonConnect poly_connect_to_pad<=8 [(AsMM(PadXSize_AllLayers)<8.01)or(AsMM(PadYSize_AllLayers)<=8.01)] p25: thpad.connectstyle=Relief thpad.reliefconductorwidth=4.15 thpad.reliefentries=4 thpad.polygonreliefangle="90 Angle" thpad.airgapwidth=0.5 smdpad.connectstyle=Relief smdpad.reliefconductorwidth=4.35 smdpad.reliefentries=4 smdpad.polygonreliefangle="90 Angle" smdpad.airgapwidth=0.5 via.connectstyle=Direct via.reliefconductorwidth=0.254 via.reliefentries=4 via.polygonreliefangle="90 Angle" via.airgapwidth=0.254 // Правила подключения полигонов для падов от 8мм и меньше
PolygonConnect poly_connect_to_pad<=8.5 [(AsMM(PadXSize_AllLayers)<8.51)or(AsMM(PadYSize_AllLayers)<=8.51)] p26: thpad.connectstyle=Relief thpad.reliefconductorwidth=4.4 thpad.reliefentries=4 thpad.polygonreliefangle="90 Angle" thpad.airgapwidth=0.5 smdpad.connectstyle=Relief smdpad.reliefconductorwidth=4.6 smdpad.reliefentries=4 smdpad.polygonreliefangle="90 Angle" smdpad.airgapwidth=0.4 via.connectstyle=Direct via.reliefconductorwidth=0.254 via.reliefentries=4 via.polygonreliefangle="90 Angle" via.airgapwidth=0.254 // Правила подключения полигонов для падов от 8,5мм и меньше
PolygonConnect poly_connect_to_pad<=9 [(AsMM(PadXSize_AllLayers)<9.01)or(AsMM(PadYSize_AllLayers)<=9.01)] p27: thpad.connectstyle=Relief thpad.reliefconductorwidth=4.7 thpad.reliefentries=4 thpad.polygonreliefangle="90 Angle" thpad.airgapwidth=0.5 smdpad.connectstyle=Relief smdpad.reliefconductorwidth=4.9 smdpad.reliefentries=4 smdpad.polygonreliefangle="90 Angle" smdpad.airgapwidth=0.4 via.connectstyle=Direct via.reliefconductorwidth=0.254 via.reliefentries=4 via.polygonreliefangle="90 Angle" via.airgapwidth=0.254 // Правила подключения полигонов для падов от 9мм и меньше
PolygonConnect poly_connect_to_pad<=9.5 [(AsMM(PadXSize_AllLayers)<9.51)or(AsMM(PadYSize_AllLayers)<=9.51)] p28: thpad.connectstyle=Relief thpad.reliefconductorwidth=5 thpad.reliefentries=4 thpad.polygonreliefangle="90 Angle" thpad.airgapwidth=0.5 smdpad.connectstyle=Relief smdpad.reliefconductorwidth=5.2 smdpad.reliefentries=4 smdpad.polygonreliefangle="90 Angle" smdpad.airgapwidth=0.4 via.connectstyle=Direct via.reliefconductorwidth=0.254 via.reliefentries=4 via.polygonreliefangle="90 Angle" via.airgapwidth=0.254 // Правила подключения полигонов для падов от 9,5мм и меньше
PolygonConnect poly_connect_to_pad<=10 [(AsMM(PadXSize_AllLayers)<7.51)or(AsMM(PadYSize_AllLayers)<=7.51)] p29: thpad.connectstyle=Relief thpad.reliefconductorwidth=5.2 thpad.reliefentries=4 thpad.polygonreliefangle="90 Angle" thpad.airgapwidth=0.5 smdpad.connectstyle=Relief smdpad.reliefconductorwidth=5.4 smdpad.reliefentries=4 smdpad.polygonreliefangle="90 Angle" smdpad.airgapwidth=0.4 via.connectstyle=Direct via.reliefconductorwidth=0.254 via.reliefentries=4 via.polygonreliefangle="90 Angle" via.airgapwidth=0.254 // Правила подключения полигонов для падов от 10мм и меньше
PolygonConnect poly_connect_to_pad [All] p30: thpad.connectstyle=Relief thpad.reliefconductorwidth=0.25 thpad.reliefentries=4 thpad.polygonreliefangle="90 Angle" thpad.airgapwidth=0.2 smdpad.connectstyle=Relief smdpad.reliefconductorwidth=0.25 smdpad.reliefentries=4 smdpad.polygonreliefangle="90 Angle" smdpad.airgapwidth=0.2 via.connectstyle=Direct via.reliefconductorwidth=0.25 via.reliefentries=4 via.polygonreliefangle="90 Angle" via.airgapwidth=0.2 // Правила подключения полигонов общие
RoutingCorners [All] p1 off: cornerstyle=45-Degree minsetback=2.5 maxsetback=2.5
RoutingVias [All] p1: holewidth=0.3 width=0.6 viastyle="Through Hole" minholewidth=0.3 minwidth=0.6 maxholewidth=5.9 maxwidth=6.4
SilkToSilkClearance silk_to_silk_clearance_std [All] p1 off: silktosilkclearance=0.15 // Отступ текста шелкографии от других примитивов шелкографии
SilkToSolderMaskClearance silk_to_solder_mask_clearance_std [IsPad] p1 off: minsilkscreentomaskgap=0.15 clearancetoexposedcopper=FALSE // Минимальное расстояние между элементами шелкографии и вскрытой медью
SolderMaskExpansion solder_mask_expansion_std [All] p1: expansion=0.05 istentingtop=FALSE // Припуск паяльной масски
UnRoutedNet [All] p1: checkbadconnections=TRUE
Width width_35um_std [All] p1: maxlimit=10 minlimit=0.2 preferedwidth=0.2 checkconnectedcopper=TRUE // Ширина проводников (общая)
19 further rules are at their usual default settings.

## Components (designator, comment, footprint, x,y, rotation, side; value= is the part's Value field where it differs from the comment)
1 "SOLDER_PAD" PAD_5_8mm 34.5,93.15 r180 bottom
2 "SOLDER_PAD" PAD_5_8mm 15.25,93.15 r180 bottom
3 "SOLDER_PAD" PAD_5_8mm 5.621,26 r270 bottom
4 "SOLDER_PAD" PAD_5_8mm 5.567,44.25 r270 bottom
C1 "10мк" C1206 31.9,80.4 r270 bottom
C2 "0,1мк" C0603 23.4,44 r0 bottom
C3 "0,1мк" C0603 24,75.1 r180 bottom
C4 "100" C0603 12.925,81.855 r0 bottom
C5 "10мк" C1206 20.3,61.625 r90 bottom
C6 "10мк" C1206 23.05,61.625 r90 bottom
C7 "10мк" C1206 26.05,61.625 r90 bottom
DD1 "MP1584EN" "SOIC-8 with PAD" 21.275,77.533 r0 bottom
L1 "CDRH124NP-4R7MC" CDRH124 11.6,65.25 r0 bottom value=4,7мк
R1 "180к" R1206 18.95,37.8 r0 bottom
R2 "220к" R0603 29.3,81 r270 bottom
R3 "100к" R0603 16.5,81.875 r0 bottom
R4 "2к" R0603 35,47.2 r270 bottom
R5 "4,7к" R0603 16.5,84 r0 bottom
R6 "1к" R0603 24.2,35.6 r270 bottom
R7 "2к" R0603 22.4,35.6 r270 bottom
R8 "180к" R1206 40.5,67.95 r90 bottom
VD2 "10S45SP" TO-277A 13.905,75 r0 bottom
VD3 "Зеленый светодиод" VD0603 22.4,38.6 r270 bottom
VT1 "IRLML2502TRPBF" SOT23-3 23.4,47 r90 bottom
VT2 "IRFR7746PBF" D-PAK 21.4,53.7 r0 bottom
X1 "796683-2" 796683-2 25,93.4 r180 top
X2 "DS1066-03M (MW-3M)" MW-3M 46.6,74.9 r270 top
X3 "DS1069-2M (CWF-2)" CWF-2 29.9,43 r0 top
X4 "796683-2" 796683-2 30.5,28.9 r0 top
X5 "DS1066-03M (MW-3M)" MW-3M 46.6,65.9 r270 top
X6 "DS1066-03M (MW-3M)" MW-3M 30.15,36.9 r0 top
X7 "796683-2" 796683-2 5.5,35.5 r270 top
X8 "DS1069-2M (CWF-2)" CWF-2 46.25,83.75 r270 top
X9 "DS1069-2M (CWF-2)" CWF-2 29.9,49.9 r180 top

## Footprints (in the part's own frame and the unit in brackets; to place one, negate y for a bottom-side part, rotate by r counter-clockwise, add the part's x,y. Pads: shape width x height; smd on the part's side, far side on the other; paste and mask are expansions set on the pad)
796683-2 [mm]
  rect 3x3 hole 1.5: 1(-2.5,0)
  round 3 hole 1.5: 2(2.5,0)
  silkscreen extent -5,-4.39 5.5,4.7, body extent -5,-4.38 5.5,4.62, height 15.2
C0603 [mm] "Chip Capacitor, 2-Leads, Body 1,60x0,80mm, IPC Medium Density"
  rrect50% 0.85x0.95 smd: 1(-0.675,0) 2(0.675,0)
  Top Layer pour cut-out: -0.254,0.5 -0.254,-0.5 0.254,-0.5 0.254,0.5
  silkscreen extent -1.35,-0.75 1.35,0.75, body extent -0.85,-0.45 0.85,0.45, height 0.9
C1206 [mm] "Chip Capacitor, 2-Leads, Body 3,20x1,60mm, IPC Medium Density"
  rrect50% 1.05x1.8 smd: 1(-1.525,0) 2(1.525,0)
  Top Layer pour cut-out: -0.6,0.95 -0.6,-0.95 0.6,-0.95 0.6,0.95
  silkscreen extent -2.3,-1.15 2.3,1.15, body extent -1.6,-0.8 1.6,0.8, height 1.25
CDRH124 [mm]
  rect 3x5.3 smd: 1(-4.9,0) 2(4.9,0)
  silkscreen extent -6,-6 6,6, body extent -6.1,-6.15 6.2,6.15, height 4.6
CWF-2 [mm]
  rect 1.6x1.6 hole 1: 1(-1.25,-0.675)
  round 1.6 hole 1: 2(1.25,-0.675)
  silkscreen extent -3.75,-2.88 3.75,2.88, body extent -3.75,-2.87 3.75,2.88, height 7
D-PAK [mm] "D-PAK, 3-Pads, Body 6,21x6,73mm (max), IPC High Density"
  rect 2.65x0.95 smd: 1(-4.1,2.29) 3(-4.1,-2.29)
  rect 6.8x5.65 smd: 2(2,0)
  silkscreen extent -4.22,-3.35 -1.8,3.44, body extent -4.7,-3.25 4.8,3.25, height 2.3
MW-3M [mm]
  rect 1.2x1.2 hole 0.7: 1(-2,-0.45)
  round 1.2 hole 0.7: 2(0,-0.45) 3(2,-0.45)
  silkscreen extent -4,-2.25 4,2.25, body extent -3.95,-2.25 3.95,2.25, height 6
PAD_5_8mm [mm] "Площадка для пайки 5x5 мм"
  rrect50% 5x8 smd: 1(0,0)
R0603 [mm]
  rect 0.7x1 smd: 1(-0.75,0) 2(0.75,0)
  silkscreen extent -1.33,-0.73 1.33,0.73, body extent -0.8,-0.43 0.8,0.43, height 0.45
R1206 [mm] "Chip Resistor, 2-Leads, Body 3,10x1,60mm, IPC Medium Density"
  rect 1.2x1.7 smd: 1(-1.35,0) 2(1.35,0)
  silkscreen extent -2.2,-1.1 2.2,1.1, body extent -1.6,-0.8 1.6,0.8, height 0.6
"SOIC-8 with PAD" [mm]
  oval 1.45x0.85 smd: 1(0,0)
  rect 1.45x0.85 smd: 2(0,-1.27) 3(0,-2.54) 4(0,-3.81) 5(5.45,-3.81) 6(5.45,-2.54) 7(5.45,-1.27) 8(5.45,0)
  rect 2.2x4 smd: TP(2.725,-1.905)
  silkscreen extent -0.12,-4.41 4.33,1.1, body extent -0.28,-4.36 5.73,0.55, height 1.75
SOT23-3 [mm] "SOT23, 3-Leads, Body 2,90x2,30mm, Pitch 0,95mm, IPC Medium Density"
  rect 0.9x0.6 smd: 1(-1.15,0.95) 2(-1.15,-0.95) 3(1.15,0)
  silkscreen extent -0.9,-1.5 0.7,1.55, body extent -1.35,-1.5 1.15,1.5, height 1.05
TO-277A [mm] "SMPC (TO-277A)"
  rrect1% 1.27x1.4 smd: 1(-2.76,1.04) 2(-2.76,-1.04)
  rrect1% 4.8x4.72 smd: 3(1,0)
  silkscreen extent -3.25,-2.3 3.73,2.7, body extent -3.25,-2.3 3.25,2.3, height 1.2
VD0603 [mm]
  rect 0.7x1 smd: 1(-0.75,0) 2(0.75,0)
  Top Layer pour cut-out: -0.4,0.5 0.4,0.5 0.4,-0.5 -0.4,-0.5
  silkscreen extent -1.33,-0.73 1.8,0.73, body extent -0.82,-0.37 0.82,0.36, height 0.68

## Part data
C1 C5 C6 C7: library part CC1206KKX7R8BB106, "Конденсатор кер. 10мкФ 25В", Manufacturer=Yageo, Voltage=25В, Name=CC1206KKX7R8BB106, TKE=X7R
C2 C3: library part CC0603JPX7R9BB104, "Конденсатор кер. 0,1мкФ 50В", Manufacturer=Yageo, Voltage=50В, Name=CC0603JPX7R9BB104, TKE=X7R
C4: library part CC0603JRNPO9BN101, "Конденсатор кер. 100пФ 50В", Manufacturer=Yageo, Voltage=50В, Name=CC0603JRNPO9BN101, TKE=NP0
DD1: "регулируемый стабилизатор напряжения", Name=MP1584EN
L1: "Катушка с сердечником 4,7мкГн 0,8А", I saturation=5,7А, Name=CDRH124NP-4R7MC, R=0,014
R1 R8: library part RC1206FR-07180KL, "Резистор 180к 0,25Вт 1%", Manufacturer=YAGEO, Name=RC1206FR-07180KL
R2: library part RC0603FR-07220KL, "Резистор 220кОм 0,1Вт 1%", Manufacturer=YAGEO, Tolerance=1%, Name=RC0603FR-07220KL
R3: library part RC0603FR-07100KL, "Резистор 100кОм 0,1Вт 1%", Manufacturer=YAGEO, Tolerance=1%, Name=RC0603FR-07100KL
R4 R7: library part RC0603FR-072KL, "Резистор 2кОм 0,063Вт 1%", Manufacturer=YAGEO, Tolerance=1%, Name=RC0603FR-072KL
R5: library part RC0603FR-074K7L, "Резистор 4,7кОм 0,063Вт 1%", Manufacturer=YAGEO, Tolerance=1%, Name=RC0603FR-074K7L
R6: library part RC0603FR-071KL, "Резистор 1кОм 0,063Вт 1%", Manufacturer=YAGEO, Tolerance=1%, Name=RC0603FR-071KL
VD2: "Диод Шоттки 45В 10А", Manufacturer=YFW, Name=10S45SP
VD3: library part FYLS-0603BUGC, "Светодтод зеленый SMD Foryard Optoelectronics Co.", Name="Зеленый светодиод"
VT1: "N-MOSFET 20В 4,5А", Manufacturer="International Rectifier", Name=IRLML2502TRPBF
VT2: "N-MOSFET 75В, 56А", Manufacturer="Internationa Rectifier", Name=IRFR7746PBF
X1 X4 X7: "Винтовой клеммник (наборный 2х2)", Contact_2=GND, Name=796683-2
  X1: Contact_1=+24V
  X4: Contact_1=VCC
  X7: Contact_1=VOUT
X2 X5 X6: library part MW-3M, "Разъем - 3 конт. прямая вилка на плату", Contact_1=VCC, Contact_3=GND, Name="DS1066-03M (MW-3M)"
  X2: Contact_2=V_SENSE
  X5 X6: Contact_2=SIGNAL
X3 X8 X9: library part CWF-2, "Разъем - 2 конт. прямая вилка на плату", Name="DS1069-2M (CWF-2)"
  X3: Contact_1=BTN+, Contact_2=BTN-
  X8: Contact_1=VCC, Contact_2=GND
  X9: Contact_1=LED+, Contact_2=LED-

## Free pads (board coordinates)
  round 6.4 hole 3.2: 4(5,95) 5(45,95) 6(45,5) 7(5,5)

## Via types
v1: diameter 2, hole 1, Top Layer to Bottom Layer, tented both sides, 2 vias

## Nets (pads, with @x,y where several pads share a name; then routed paths per layer and width w, separated by ;. In a path a pad name is that pad's centre, name@x,y a point inside that pad or via, vN(x,y) a via of type N, cw(c..) or ccw(c..) an arc to the next point about the centre after c; other vN are vias at no path point)
GND: 2.1 C1.1 C2.1 C4.1 C5.1 C6.1 C7.1 DD1.5 DD1.TP R2.1 R5.1 VD2.1 VD2.2 VT1.2 VT2.3 X1.2 X2.3 X3.2 X5.3 X8.2 | length 120.8
  Bottom Layer w0.4: C4.1 12.25,85.05 12.7,85.5 16.1,85.5 ; R5.1 15.75,85.15 16.1,85.5 ; VT2.3 14.89,55.99 14.5,55.6 14.5,49.3 19.8,44 C2.1 22.725,42.375 24.9,40.2 30.5,40.2 31.15,40.85 X3.2 ; VT1.2 22.55,45.75 22.55,45.416 22.6,45.366 22.6,44.509 22.608,44.502 C2.1@22.608,44.217 ; 23.6,85.5 16.1,85.5
  Bottom Layer w0.7: X1.2 22.5,97.4 24.2,99.1 38.7,99.1 40.6,97.2 40.6,91.9 42.5,90 46.2,90 48.6,87.6 48.6,82.91 ; X8.2 48.19,82.5 48.6,82.91 ; X5.3 46.16,63.89 48.09,63.89 48.6,64.4 48.6,73.4 ; X2.3 48.1,72.9 48.6,73.4 ; 48.6,73.4 48.6,82.91
GND_OUT: 4.1 R1.1 X4.1 X7.1
I_REG: C2.2 VT1.1 X3.1 X6.2 | length 22.9
  Bottom Layer w0.4: C2.2 24.075,43.95 25.7,42.325 X3.1 28.65,44.25 29.2,44.8 32.3,44.8 33.1,44 33.1,40.7 30.15,37.75 X6.2 ; C2.2@24.175,44 24.175,45.525 24.35,45.7 VT1.1
NetC3_1: C3.1 DD1.8 | length 4.2
  Bottom Layer w0.4: C3.1 26.3,75.1 26.725,75.525 DD1.8
NetC3_2: C3.2 DD1.1 L1.1 VD2.3
NetC4_2: C4.2 R3.1 | length 2.2
  Bottom Layer w0.4: C4.2 13.61,81.865 15.74,81.865 R3.1
NetDD1_3: DD1.3 R3.2 | length 4.8
  Bottom Layer w0.4: R3.2 17.341,81.784 17.966,81.784 19.677,80.073 DD1.3
NetDD1_6: DD1.6 R2.2 | length 2.6
  Bottom Layer w0.4: DD1.6 26.902,80.25 R2.2
NetR1_2: R1.2 R6.1 VD3.2 | length 5.1
  Bottom Layer w0.4: R1.2 20.35,37.85 VD3.2 23.65,37.85 24.2,37.3 R6.1
NetR4_1: R4.1 X9.1 | length 5.7
  Bottom Layer w0.4: X9.1 33.625,50.575 35,49.2 R4.1
NetR6_2: R6.2 X6.3 | length 9.2
  Bottom Layer w0.4: R6.2 31.55,34.85 32.15,35.45 X6.3
NetR7_1: R7.1 VD3.1 X6.1 | length 16.9
  Bottom Layer w0.4: R7.1 19.451,36.35 19,36.801 19,39.116 19.234,39.35 VD3.1 23.95,39.35 24.7,38.6 26.9,38.6 28.1,37.4 28.1,36.5 X6.1
NetR8_1: R8.1 X5.2 | length 5.9
  Bottom Layer w0.4: R8.1 43.1,66.6 43.8,65.9 X5.2
NetVT1_3: VT1.3 VT2.1 X9.2 | length 15.1
  Bottom Layer w0.4: VT2.1 17.3,48.95 18.1,48.15 VT1.3 26.225,48.15 X9.2
NetVT2_2: VT2.2 X4.2 | length 46.2
  Bottom Layer w3: VT2.2 24.5,54.8 35.2,54.8 41.3,48.7 41.3,33.7 36.5,28.9 X4.2
V_REG: DD1.4 R5.2 R8.2 | length 36.9
  Top Layer w0.4: v1(20.3,83.9) 20.3,83.837 19.2,82.737 19.2,79 23,75.2 v1(30.4,75.2)
  Bottom Layer w0.4: R5.2 20.2,84 20.2,83.567 20.75,83.017 20.75,81.568 20.975,81.343 DD1.4 ; v1(30.4,75.2) 34.35,75.2 40.25,69.3 R8.2
VIN: 1.1 C1.2 DD1.7 X1.1 X2.1 X8.1 | length 29
  Bottom Layer w0.6: C1.2 34.275,78.875 34.7,79.3 34.7,81.6 38.1,85 41.6,85 ; X8.1 41.6,85 ; X2.1 43.6,76.9 41.6,78.9 41.6,85
VOUT: 3.1 C5.2 C6.2 C7.2 L1.2 R4.2 R7.2 X2.2 X5.1 X7.2 | length 98
  Bottom Layer w0.4: R7.2 22.4,34.1 23.7,32.8 29.8,32.8 30.6,32
  Bottom Layer w0.5: C7.2 26.05,64.75 29.2,67.9 42.2,67.9 ; X5.1 42.2,67.9 ; X2.2 43.1,74.9 42.2,74 42.2,67.9
  Bottom Layer w0.6: 3.1 11.2,26 16.7,20.5 28.8,20.5 30.6,22.3 30.6,32 32,33.4 33.4,33.4 35,35 R4.2
pads on no net: DD1.2

## Polygon pours and split planes (outlines as drawn)
VIN on Bottom Layer "VIN_L02_P000" (solid, remove dead copper, pour order 0): 34.4,80.6 34.4,85.15 31.05,88.5 29.2,88.5 26.4,91.3 26.4,97.7 37.5,97.7 39,96.2 39,81.3 35.8,78.1 26,78.1 26,79.5 33.3,79.5
GND_OUT on Bottom Layer "GND_OUT_L02_P005" (solid, pour order 5): 25.6,31.6 29.4,31.6 29.4,25.3 22,25.3 15.6,31.7 10.3,37 2.9,37 0.6,39.3 0.6,49.5 10.5,49.5 18.3,41.7 18.3,36.1 22.8,31.6
VOUT on Bottom Layer "VOUT_L02_P004" (solid, remove dead copper, pour order 4): 14.7,67.7 16.3,69.3 35.2,69.3 49.2,55.3 49.2,23.7 42.5,17 5.8,17 0.8,22 0.8,33.3 1.7,34.2 9.6,34.2 13.3,30.5 20.4,23.4 36.4,23.4 44.6,31.6 44.6,51.3 33.6,62.3 14.7,62.3
GND on Bottom Layer "GND_L02_P002" (solid, remove dead copper, pour order 2): 16.6,58.6 19.1,61.1 28.3,61.1 28.3,58.1 26.1,58.1 19.5,58.1 17.7,56.3 17.7,54.8 4.1,54.8 0.6,58.3 0.6,81.825 6.1,87.325 10,91.225 10,97.75 11.75,99.5 22.5,99.5 23.6,98.4 23.6,90.9 27.3,87.2 30.4,87.2 32.5,85.1 32.5,81 25.8,81 25.8,82.1 25.1,82.1 25,82 25,76.4 22.9,76.4 22.9,86.9 22,87.8 11.825,87.8 8.9,84.875 8.9,78 9.7,77.2 11.7,77.2 11.7,72.7 4,72.7 3.1,71.8 3.1,60.6 5.1,58.6
NetC3_2 on Bottom Layer "NETC3_2_L02_P001" (solid, pour order 1): 20.1,73.8 23.746,73.8 23.746,75.6 22.8,75.6 22,76.4 22,78 13,78 12.5,77.5 12.5,72.5 9.7,69.7 5.4,69.7 4.1,68.4 4.1,62.6 5.3,61.4 9.1,61.4 10.3,62.6 10.3,65.8 15.5,71 17.3,71

## Silkscreen, mask and mechanical layers (free items; w line width, h text height)
Board Shape:
  circle w0.013: c45,5 r1.6
  circle w0.013: c5,5 r1.6
  circle w0.013: c45,95 r1.6
  circle w0.013: c5,95 r1.6
  lines w0.013: 0,20 25,20 25,100 ; 10,20 10,0 0,0 ; 0,0 50,0 ; 0,0 50,0 ; 0,0 0,100 ; 0,0 0,100 ; 0,100 50,100 ; 0,100 50,100 ; 50,0 50,100